# Allegro board PMOD2BNCSIMPLE_v1_06_62mil_cheap.brd
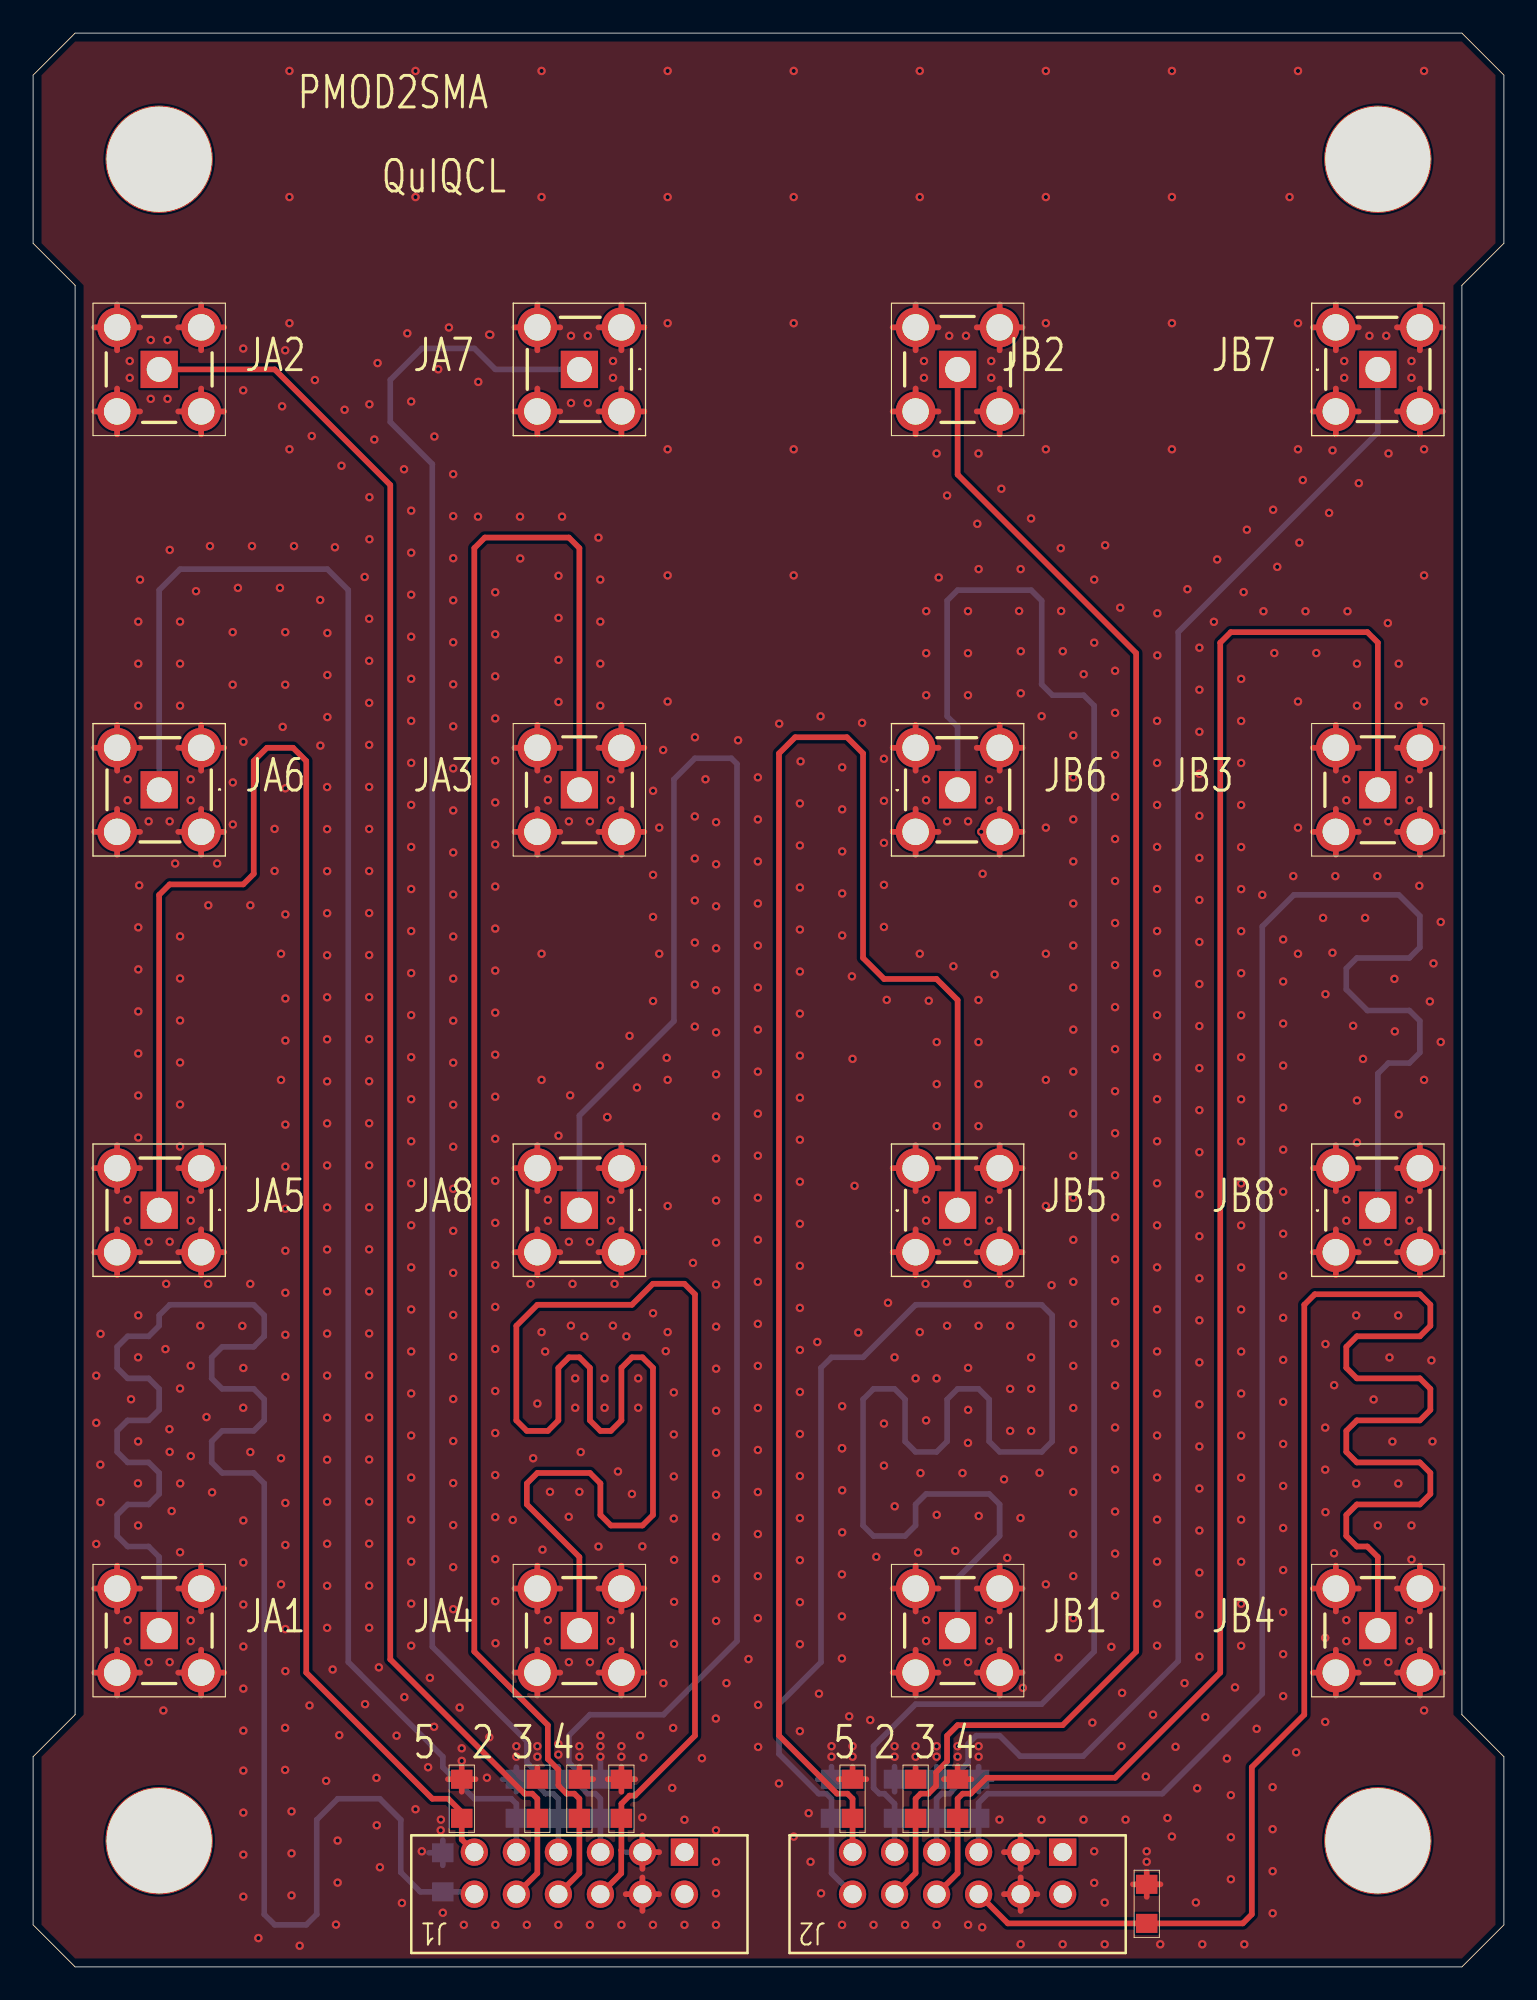
[diagram p0: board, top side]
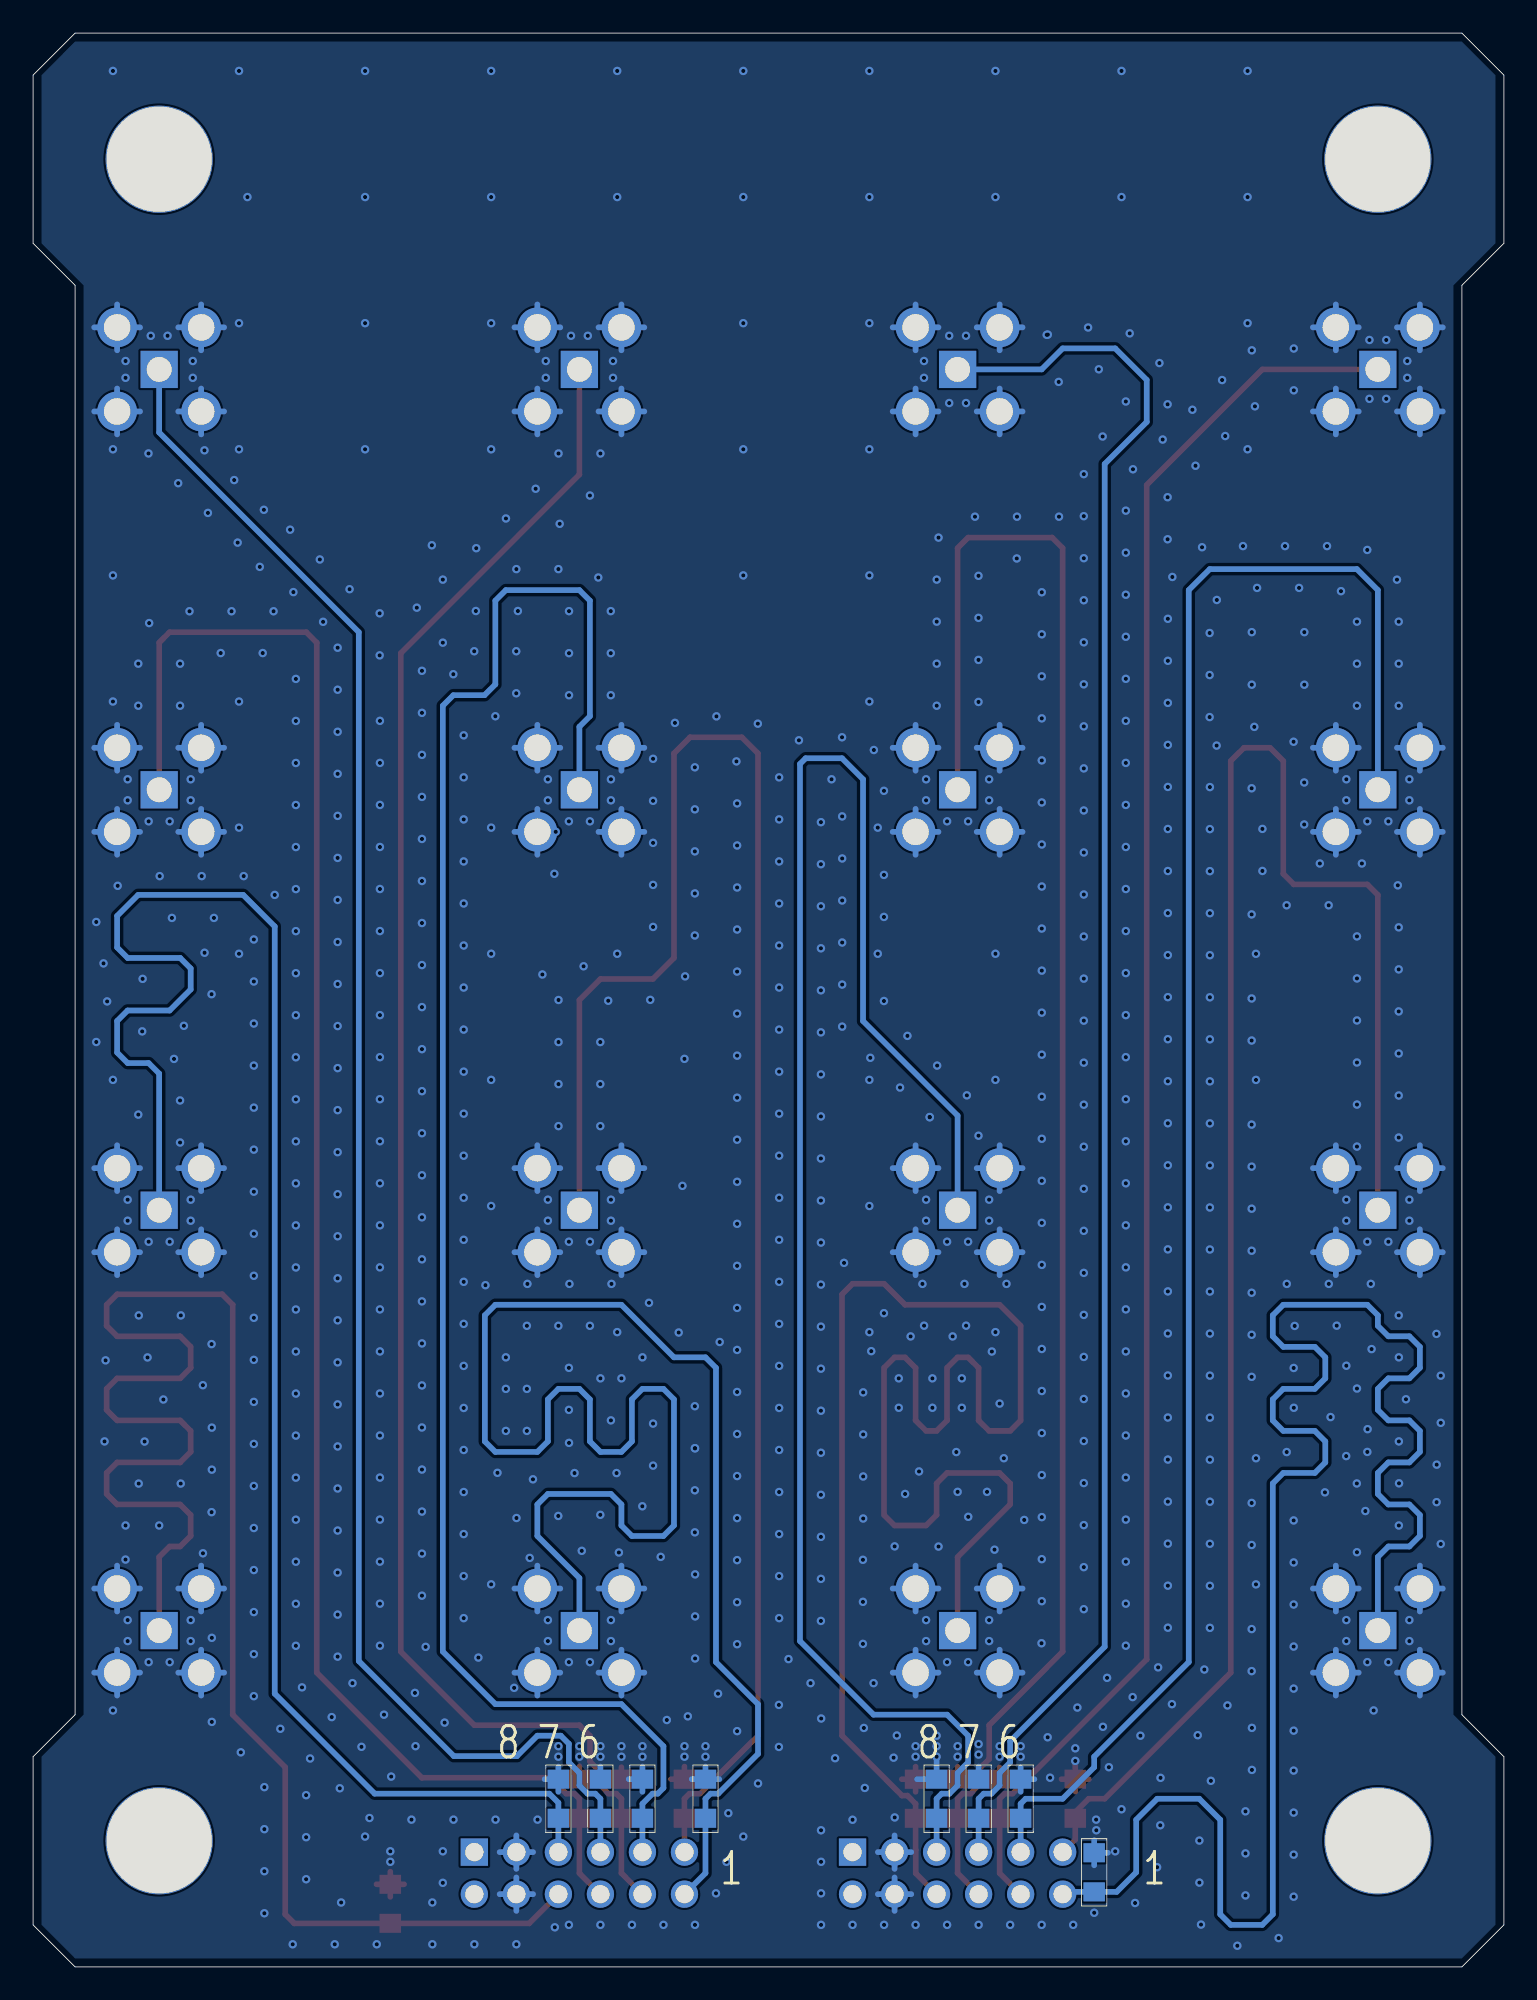
[diagram p1: board, bottom side, seen from below]

Outline 88.9 x 116.84 mm; copper layers: TOP, GND1, GND2, BOTTOM. Coordinates in mm from the lower left corner of the outline.
Outline path: 0,114.3 0,104.14 2.54,101.6 2.54,15.24 0,12.7 0,2.54 2.54,0 86.36,0 88.9,2.54 88.9,12.7 86.36,15.24 86.36,101.6 88.9,104.14 88.9,114.3 86.36,116.84 2.54,116.84 0,114.3

## Design rules (mm)
nets with their own width: min track width 0.34; nets GND N17882 N17894 N17906 N17918 N17930 N17948 N17973 N17998 N19655 N19661 N19667 N19673 N19679 N19687 N19697 N19707

## Placement (name value [footprint] x y rotation side)
J1  71764_0114  [717640112]  22.86 0.84 180 top
J2  71764_0114  [717640112]  45.72 0.84 180 top
NOREF  -  [unnamed]  81.28 7.62 0 top
NOREF#2  -  [unnamed]  81.28 109.22 0 top
NOREF#3  -  [unnamed]  7.62 7.62 0 top
NOREF#4  -  [unnamed]  7.62 109.22 0 top
R1  -  [RES_0805]  34.29 10.16 90 bottom
R2  -  [RES_0805]  31.75 10.16 90 bottom
R3  -  [RES_0805]  29.21 10.16 90 bottom
R4  -  [RES_0805]  25.91 10.16 90 top
R5  -  [RES_0805]  24.77 5.71 90 bottom
R6  -  [RES_0805]  30.48 10.16 90 top
R7  -  [RES_0805]  33.02 10.16 90 top
R8  -  [RES_0805]  35.56 10.16 90 top
R9  -  [RES_0805]  57.15 10.16 90 bottom
R10  -  [RES_0805]  54.61 10.16 90 bottom
R11  -  [RES_0805]  52.07 10.16 90 bottom
R12  -  [RES_0805]  49.53 10.16 90 top
R13  -  [RES_0805]  48.26 10.16 90 bottom
R14  -  [RES_0805]  53.34 10.16 90 top
R15  -  [RES_0805]  55.88 10.16 90 top
R16  -  [RES_0805]  67.31 3.81 90 top
U1  -  [SMA-R-RA]  7.62 45.72 180 top
U2  -  [SMAFST_PCBN]  7.62 20.32 180 top
U3  -  [SMA-R-RA]  7.62 71.12 180 top
U4  -  [SMAFST_PCBN]  7.62 96.52 180 top
U5  -  [SMA-R-RA]  33.02 96.52 180 top
U6  -  [SMAFST_PCBN]  33.02 71.12 180 top
U7  -  [SMA-R-RA]  33.02 45.72 180 top
U8  -  [SMAFST_PCBN]  33.02 20.32 180 top
U9  -  [SMA-R-RA]  55.88 45.72 0 top
U10  -  [SMAFST_PCBN]  55.88 20.32 180 top
U11  -  [SMA-R-RA]  55.88 71.12 0 top
U12  -  [SMAFST_PCBN]  55.88 96.52 180 top
U13  -  [SMA-R-RA]  81.28 96.52 0 top
U14  -  [SMAFST_PCBN]  81.28 71.12 180 top
U15  -  [SMA-R-RA]  81.28 45.72 0 top
U16  -  [SMAFST_PCBN]  81.28 20.32 180 top

## Library data of the parts
J1 J2 = 71764_0114
R1-R3 R5-R16 = RES_0805
R4 = RES_0805: signal model: resistorPack_850
U1 U3 U5 U7 U9 U11 U13 U15 = SMA-R-RA
U2 U4 U6 U8 U10 U12 U14 U16 = SMAFST_PCBN

## Footprints (pads in the part's own frame, mm; a bottom-side part is the same pattern mirrored in y, then rotated)
717640112
  rect 1.651x1.651 hole 1.1: 1(-16.51,-6.096)
  round 1.651 hole 1.1: 2(-16.51,-3.556) 3(-13.97,-6.096) 4(-13.97,-3.556) 5(-11.43,-6.096) 6(-11.43,-3.556) 7(-8.89,-6.096) 8(-8.89,-3.556) 9(-6.35,-6.096) 10(-6.35,-3.556) 11(-3.81,-6.096) 12(-3.81,-3.556)
RES_0805
  rect 1.151x1.3 smd: 1(1.181,0) 2(-1.181,0)
SMA-R-RA
  rect 2.25x2.25 hole 1.501: 1(0,0)
  round 2.4 hole 1.6: 2(-2.54,2.54) 3(-2.54,-2.54) 4(2.54,-2.54) 5(2.54,2.54)
SMAFST_PCBN
  rect 2.25x2.25 hole 1.501: 1(0,0)
  round 2.4 hole 1.6: 2(-2.54,-2.54) 3(2.54,-2.54) 4(2.54,2.54) 5(-2.54,2.54)
unnamed
  round 6.477 hole 6.35 unplated: (0,0)

## Nets
GND: J1.3 J1.4 J2.3 J2.4 R1.1 R2.1 R3.1 R4.1 R5.1 R6.1 R7.1 R8.1 R9.1 R10.1 R11.1 R12.1 R13.1 R14.1 R15.1 R16.1 U1.2 U1.3 U1.4 U1.5 U2.2 U2.3 U2.4 U2.5 U3.2 U3.3 U3.4 U3.5 U4.2 U4.3 U4.4 U4.5 U5.2 U5.3 U5.4 U5.5 U6.2 U6.3 U6.4 U6.5 U7.2 U7.3 U7.4 U7.5 U8.2 U8.3 U8.4 U8.5 U9.2 U9.3 U9.4 U9.5 U10.2 U10.3 U10.4 U10.5 U11.2 U11.3 U11.4 U11.5 U12.2 U12.3 U12.4 U12.5 U13.2 U13.3 U13.4 U13.5 U14.2 U14.3 U14.4 U14.5 U15.2 U15.3 U15.4 U15.5 U16.2 U16.3 U16.4 U16.5
N17882: J1.11 R4.2 U1.1
N17894: J1.9 R3.2 U3.1
N17906: J1.7 R2.2 U5.1
N17918: J1.5 R1.2 U7.1
N17930: J1.12 R5.2 U2.1
N17948: J1.10 R6.2 U4.1
N17973: J1.8 R7.2 U6.1
N17998: J1.6 R8.2 U8.1
N19655: J2.11 R12.2 U9.1
N19661: J2.9 R11.2 U11.1
N19667: J2.7 R10.2 U13.1
N19673: J2.5 R9.2 U15.1
N19679: J2.12 R13.2 U10.1
N19687: J2.10 R14.2 U12.1
N19697: J2.8 R15.2 U14.1
N19707: J2.6 R16.2 U16.1

Pads without a net: J1 1 2; J2 1 2

## Via types
v1: diameter 0.508, hole 0.254, TOP to BOTTOM, 990 vias

## Routing (per net, layer and track width the routed paths; a pad name or vN(x,y) marks a point on that pad's centre or on a via; arc(x,y) is an arc through that point)
GND: length 1509.2
  TOP w0.34: 82.44,17.78 U16.5 ; U16.5 83.82,19.16 ; U16.5 83.82,16.4 ; U16.5 85.2,17.78 ; U5.2 36.94,93.98 ; U5.2 35.56,95.36 ; U5.2 35.56,92.6 ; U5.2 34.18,93.98 ; U6.4 30.48,69.96 ; U6.4 31.86,68.58 ; U6.4 30.48,67.2 ; U6.4 29.1,68.58 ; 34.73,11.34 R8.1 ; R8.1 36.39,11.34 ; R8.1 35.56,12.1 ; R8.1 35.56,10.58 ; U15.2 78.74,49.64 ; U15.2 78.74,46.88 ; U15.2 77.36,48.26 ; U15.2 80.12,48.26 ; U8.4 31.86,17.78 ; U8.4 30.48,16.4 ; U8.4 29.1,17.78 ; U8.4 30.48,19.16 ; U2.2 11.54,22.86 ; U2.2 10.16,24.24 ; U2.2 8.78,22.86 ; U2.2 10.16,21.48 ; U8.2 35.56,24.24 ; U8.2 36.94,22.86 ; U8.2 35.56,21.48 ; U8.2 34.18,22.86 ; 58.42,16.4 U10.5 ; U10.5 59.8,17.78 ; U10.5 58.42,19.16 ; U10.5 57.04,17.78 ; 51.96,99.06 U12.3 ; U12.3 53.34,97.68 ; U12.3 54.72,99.06 ; U12.3 53.34,100.44 ; 35.56,41.8 U7.2 ; U7.2 36.94,43.18 ; U7.2 35.56,44.56 ; U7.2 34.18,43.18 ; 34.18,48.26 U7.3 ; U7.3 35.56,49.64 ; U7.3 35.56,46.88 ; U7.3 36.94,48.26 ; 58.42,97.68 U12.2 ; U12.2 57.04,99.06 ; U12.2 58.42,100.44 ; U12.2 59.8,99.06 ; U9.2 54.72,48.26 ; U9.2 53.34,49.64 ; U9.2 51.96,48.26 ; U9.2 53.34,46.88 ; U2.4 5.08,19.16 ; U2.4 6.46,17.78 ; U2.4 5.08,16.4 ; U2.4 3.7,17.78 ; 82.44,99.06 U13.5 ; U13.5 83.82,100.44 ; U13.5 83.82,97.68 ; U13.5 85.2,99.06 ; U12.5 59.8,93.98 ; U12.5 58.42,92.6 ; U12.5 57.04,93.98 ; U12.5 58.42,95.36 ; 10.16,92.6 U4.5 ; U4.5 11.54,93.98 ; U4.5 10.16,95.36 ; U4.5 8.78,93.98 ; 58.42,41.8 U9.4 ; U9.4 58.42,44.56 ; U9.4 57.04,43.18 ; U9.4 59.8,43.18 ; 53.34,21.48 U10.3 ; U10.3 54.72,22.86 ; U10.3 51.96,22.86 ; U10.3 53.34,24.24 ; U7.4 30.48,49.64 ; U7.4 30.48,46.88 ; U7.4 29.1,48.26 ; U7.4 31.86,48.26 ; U12.4 54.72,93.98 ; U12.4 51.96,93.98 ; U12.4 53.34,95.36 ; U12.4 53.34,92.6 ; U16.4 78.74,19.16 ; U16.4 78.74,16.4 ; U16.4 80.12,17.78 ; U16.4 77.36,17.78 ; U16.2 85.2,22.86 ; U16.2 82.44,22.86 ; U16.2 83.82,21.48 ; U16.2 83.82,24.24 ; U1.4 6.46,48.26 ; U1.4 5.08,49.64 ; U1.4 3.7,48.26 ; U1.4 5.08,46.88 ; 5.08,92.6 U4.4 ; U4.4 6.46,93.98 ; U4.4 3.7,93.98 ; U4.4 5.08,95.36 ; U15.4 85.2,43.18 ; U15.4 83.82,41.8 ; U15.4 82.44,43.18 ; U15.4 83.82,44.56 ; 77.36,43.18 U15.3 ; U15.3 78.74,41.8 ; U15.3 80.12,43.18 ; U15.3 78.74,44.56 ; J1.4 36.83,5.4 ; J1.4 35.82,4.39 ; J1.4 36.83,3.39 ; J1.4 37.84,4.39 ; 58.68,6.93 J2.3 ; J2.3 59.69,5.93 ; J2.3 59.69,7.94 ; J2.3 60.7,6.93 ; 25.07,11.34 R4.1 ; R4.1 26.74,11.34 ; R4.1 25.91,10.58 ; R4.1 v1(25.91,12.45) ; 35.56,16.4 U8.5 ; U8.5 36.94,17.78 ; U8.5 35.56,19.16 ; U8.5 34.18,17.78 ; 78.74,67.2 U14.4 ; U14.4 80.12,68.58 ; U14.4 77.36,68.58 ; U14.4 78.74,69.96 ; U4.3 6.46,99.06 ; U4.3 3.7,99.06 ; U4.3 5.08,97.68 ; U4.3 5.08,100.44 ; 66.48,4.99 R16.1 ; R16.1 67.31,5.75 ; R16.1 68.14,4.99 ; R16.1 67.31,4.23 ; U2.5 10.16,19.16 ; U2.5 10.16,16.4 ; U2.5 11.54,17.78 ; U2.5 8.78,17.78 ; U5.4 31.86,99.06 ; U5.4 30.48,100.44 ; U5.4 30.48,97.68 ; U5.4 29.1,99.06 ; U6.3 31.86,73.66 ; U6.3 30.48,72.28 ; U6.3 30.48,75.04 ; U6.3 29.1,73.66 ; 10.16,46.88 U1.3 ; U1.3 10.16,49.64 ; U1.3 11.54,48.26 ; U1.3 8.78,48.26 ; R12.1 50.36,11.34 ; R12.1 49.53,12.1 ; R12.1 48.7,11.34 ; U14.5 85.2,68.58 ; U14.5 83.82,69.96 ; U14.5 82.44,68.58 ; U14.5 83.82,67.2 ; U7.5 31.86,43.18 ; U7.5 30.48,41.8 ; U7.5 30.48,44.56 ; U7.5 29.1,43.18 ; 36.83,5.93 J1.3 ; J1.3 37.84,6.93 ; J1.3 36.83,7.94 ; U9.3 53.34,44.56 ; U9.3 54.72,43.18 ; U9.3 53.34,41.8 ; U9.3 51.96,43.18 ; 5.08,67.2 U3.5 ; U3.5 5.08,69.96 ; U3.5 6.46,68.58 ; U3.5 3.7,68.58 ; 58.42,72.28 U11.5 ; U11.5 57.04,73.66 ; U11.5 59.8,73.66 ; U11.5 58.42,75.04 ; 10.16,97.68 U4.2 ; U4.2 8.78,99.06 ; U4.2 11.54,99.06 ; U4.2 10.16,100.44 ; U5.5 31.86,93.98 ; U5.5 30.48,95.36 ; U5.5 29.1,93.98 ; U5.5 30.48,92.6 ; 35.56,67.2 U6.5 ; U6.5 36.94,68.58 ; U6.5 35.56,69.96 ; U6.5 34.18,68.58 ; U10.2 58.42,24.24 ; U10.2 58.42,21.48 ; U10.2 57.04,22.86 ; U10.2 59.8,22.86 ; 53.34,67.2 U11.3 ; U11.3 54.72,68.58 ; U11.3 51.96,68.58 ; U11.3 53.34,69.96 ; 83.82,46.88 U15.5 ; U15.5 82.44,48.26 ; U15.5 85.2,48.26 ; U15.5 83.82,49.64 ; U1.2 10.16,44.56 ; U1.2 10.16,41.8 ; U1.2 11.54,43.18 ; U1.2 8.78,43.18 ; 5.08,41.8 U1.5 ; U1.5 6.46,43.18 ; U1.5 5.08,44.56 ; U1.5 3.7,43.18 ; U3.4 6.46,73.66 ; U3.4 5.08,75.04 ; U3.4 5.08,72.28 ; U3.4 3.7,73.66 ; 53.34,16.4 U10.4 ; U10.4 54.72,17.78 ; U10.4 51.96,17.78 ; U10.4 53.34,19.16 ; R15.1 56.71,11.34 ; R15.1 55.05,11.34 ; R15.1 55.88,12.13 ; U14.2 83.82,75.04 ; U14.2 82.44,73.66 ; U14.2 85.2,73.66 ; U14.2 83.82,72.28 ; U5.3 36.94,99.06 ; U5.3 34.18,99.06 ; U5.3 35.56,97.68 ; U5.3 35.56,100.44 ; 33.02,12.1 R7.1 33.85,11.34 ; U8.3 30.48,24.24 ; U8.3 29.1,22.86 ; U8.3 31.86,22.86 ; U8.3 30.48,21.48 ; U13.2 80.12,99.06 ; U13.2 78.74,100.44 ; U13.2 77.36,99.06 ; U13.2 78.74,97.68 ; U14.3 80.12,73.66 ; U14.3 78.74,75.04 ; U14.3 77.36,73.66 ; U14.3 78.74,72.28 ; 53.34,72.28 U11.2 ; U11.2 54.72,73.66 ; U11.2 51.96,73.66 ; U11.2 53.34,75.04 ; 8.78,68.58 U3.2 ; U3.2 10.16,69.96 ; U3.2 10.16,67.2 ; U3.2 11.54,68.58 ; U16.3 80.12,22.86 ; U16.3 78.74,24.24 ; U16.3 77.36,22.86 ; U16.3 78.74,21.48 ; U13.3 78.74,95.36 ; U13.3 80.12,93.98 ; U13.3 78.74,92.6 ; U13.3 77.36,93.98 ; 58.42,46.88 U9.5 ; U9.5 58.42,49.64 ; U9.5 59.8,48.26 ; U9.5 57.04,48.26 ; U2.3 5.08,24.24 ; U2.3 6.46,22.86 ; U2.3 5.08,21.48 ; U2.3 3.7,22.86 ; J2.4 59.69,5.4 ; J2.4 60.7,4.39 ; J2.4 58.68,4.39 ; J2.4 59.69,3.39 ; R6.1 30.48,12.06 ; 35.56,72.28 U6.2 ; U6.2 34.18,73.66 ; U6.2 35.56,75.04 ; U6.2 36.94,73.66 ; 82.44,93.98 U13.4 ; U13.4 83.82,95.36 ; U13.4 85.2,93.98 ; U13.4 83.82,92.6 ; U3.3 11.54,73.66 ; U3.3 8.78,73.66 ; U3.3 10.16,75.04 ; U3.3 10.16,72.28 ; U11.4 59.8,68.58 ; U11.4 58.42,67.2 ; U11.4 58.42,69.96 ; R14.1 53.34,12.06
  GND1 w0.34: U5.3 36.94,99.06 ; U5.3 34.18,99.06 ; U5.3 35.56,100.44 ; U5.3 35.56,97.68 ; 30.48,97.68 U5.4 ; U5.4 31.86,99.06 ; U5.4 29.1,99.06 ; U5.4 30.48,100.44 ; 58.68,6.93 J2.3 ; J2.3 59.69,7.94 ; J2.3 60.7,6.93 ; J2.3 59.69,5.93 ; U2.5 10.16,19.16 ; U2.5 8.78,17.78 ; U2.5 10.16,16.4 ; U2.5 11.54,17.78 ; 35.56,41.8 U7.2 ; U7.2 34.18,43.18 ; U7.2 36.94,43.18 ; U7.2 35.56,44.56 ; 83.82,72.28 U14.2 ; U14.2 82.44,73.66 ; U14.2 83.82,75.04 ; U14.2 85.2,73.66 ; U10.2 59.8,22.86 ; U10.2 58.42,24.24 ; U10.2 58.42,21.48 ; U10.2 57.04,22.86 ; U16.4 78.74,19.16 ; U16.4 80.12,17.78 ; U16.4 78.74,16.4 ; U16.4 77.36,17.78 ; 34.18,22.86 U8.2 ; U8.2 35.56,21.48 ; U8.2 36.94,22.86 ; U8.2 35.56,24.24 ; U2.4 5.08,19.16 ; U2.4 3.7,17.78 ; U2.4 5.08,16.4 ; U2.4 6.46,17.78 ; U15.4 83.82,44.56 ; U15.4 82.44,43.18 ; U15.4 83.82,41.8 ; U15.4 85.2,43.18 ; 8.78,43.18 U1.2 ; U1.2 11.54,43.18 ; U1.2 10.16,41.8 ; U1.2 10.16,44.56 ; 78.74,72.28 U14.3 ; U14.3 80.12,73.66 ; U14.3 77.36,73.66 ; U14.3 78.74,75.04 ; U10.3 54.72,22.86 ; U10.3 51.96,22.86 ; U10.3 53.34,24.24 ; U10.3 53.34,21.48 ; J1.3 37.84,6.93 ; J1.3 36.83,5.93 ; J1.3 35.82,6.93 ; J1.3 36.83,7.94 ; 57.04,93.98 U12.5 ; U12.5 58.42,95.36 ; U12.5 58.42,92.6 ; U12.5 59.8,93.98 ; 78.74,46.88 U15.2 ; U15.2 80.12,48.26 ; U15.2 77.36,48.26 ; U15.2 78.74,49.64 ; U11.2 53.34,75.04 ; U11.2 53.34,72.28 ; U11.2 51.96,73.66 ; U11.2 54.72,73.66 ; U6.3 30.48,75.04 ; U6.3 30.48,72.28 ; U6.3 29.1,73.66 ; U6.3 31.86,73.66 ; U15.3 80.12,43.18 ; U15.3 78.74,44.56 ; U15.3 77.36,43.18 ; U15.3 78.74,41.8 ; U6.5 36.94,68.58 ; U6.5 35.56,69.96 ; U6.5 34.18,68.58 ; U6.5 35.56,67.2 ; U3.5 5.08,69.96 ; U3.5 6.46,68.58 ; U3.5 5.08,67.2 ; U3.5 3.7,68.58 ; U7.5 31.86,43.18 ; U7.5 29.1,43.18 ; U7.5 30.48,44.56 ; U7.5 30.48,41.8 ; U8.4 30.48,19.16 ; U8.4 30.48,16.4 ; U8.4 31.86,17.78 ; U8.4 29.1,17.78 ; U7.3 36.94,48.26 ; U7.3 35.56,49.64 ; U7.3 35.56,46.88 ; U7.3 34.18,48.26 ; 78.74,67.2 U14.4 ; U14.4 80.12,68.58 ; U14.4 77.36,68.58 ; U14.4 78.74,69.96 ; U3.4 6.46,73.66 ; U3.4 3.7,73.66 ; U3.4 5.08,72.28 ; U3.4 5.08,75.04 ; 58.42,16.4 U10.5 ; U10.5 58.42,19.16 ; U10.5 57.04,17.78 ; U10.5 59.8,17.78 ; 83.82,97.68 U13.5 ; U13.5 83.82,100.44 ; U13.5 82.44,99.06 ; U13.5 85.2,99.06 ; U9.3 53.34,44.56 ; U9.3 53.34,41.8 ; U9.3 54.72,43.18 ; U9.3 51.96,43.18 ; 58.42,97.68 U12.2 ; U12.2 58.42,100.44 ; U12.2 59.8,99.06 ; U12.2 57.04,99.06 ; U12.3 53.34,100.44 ; U12.3 53.34,97.68 ; U12.3 51.96,99.06 ; U12.3 54.72,99.06 ; U9.4 59.8,43.18 ; U9.4 57.04,43.18 ; U9.4 58.42,44.56 ; U9.4 58.42,41.8 ; U10.4 53.34,19.16 ; U10.4 54.72,17.78 ; U10.4 53.34,16.4 ; U10.4 51.96,17.78 ; U1.3 10.16,49.64 ; U1.3 10.16,46.88 ; U1.3 11.54,48.26 ; U1.3 8.78,48.26 ; U4.3 5.08,100.44 ; U4.3 6.46,99.06 ; U4.3 5.08,97.68 ; U4.3 3.7,99.06 ; 5.08,46.88 U1.4 ; U1.4 3.7,48.26 ; U1.4 6.46,48.26 ; U1.4 5.08,49.64 ; U1.5 6.46,43.18 ; U1.5 5.08,41.8 ; U1.5 3.7,43.18 ; U1.5 5.08,44.56 ; 83.82,46.88 U15.5 ; U15.5 83.82,49.64 ; U15.5 85.2,48.26 ; U15.5 82.44,48.26 ; 58.42,72.28 U11.5 ; U11.5 57.04,73.66 ; U11.5 59.8,73.66 ; U11.5 58.42,75.04 ; 82.44,68.58 U14.5 ; U14.5 85.2,68.58 ; U14.5 83.82,67.2 ; U14.5 83.82,69.96 ; U9.5 59.8,48.26 ; U9.5 58.42,49.64 ; U9.5 58.42,46.88 ; U9.5 57.04,48.26 ; J1.4 36.83,5.4 ; J1.4 36.83,3.39 ; J1.4 35.82,4.39 ; J1.4 37.84,4.39 ; J2.4 59.69,5.4 ; J2.4 59.69,3.39 ; J2.4 60.7,4.39 ; J2.4 58.68,4.39 ; U13.2 78.74,100.44 ; U13.2 80.12,99.06 ; U13.2 77.36,99.06 ; U13.2 78.74,97.68 ; U5.5 30.48,95.36 ; U5.5 30.48,92.6 ; U5.5 31.86,93.98 ; U5.5 29.1,93.98 ; U6.4 31.86,68.58 ; U6.4 29.1,68.58 ; U6.4 30.48,69.96 ; U6.4 30.48,67.2 ; U8.3 30.48,24.24 ; U8.3 30.48,21.48 ; U8.3 31.86,22.86 ; U8.3 29.1,22.86 ; 82.44,17.78 U16.5 ; U16.5 85.2,17.78 ; U16.5 83.82,19.16 ; U16.5 83.82,16.4 ; 8.78,22.86 U2.2 ; U2.2 10.16,24.24 ; U2.2 11.54,22.86 ; U2.2 10.16,21.48 ; U11.3 53.34,69.96 ; U11.3 51.96,68.58 ; U11.3 54.72,68.58 ; U11.3 53.34,67.2 ; U13.4 83.82,95.36 ; U13.4 82.44,93.98 ; U13.4 85.2,93.98 ; U13.4 83.82,92.6 ; 51.96,48.26 U9.2 ; U9.2 53.34,49.64 ; U9.2 54.72,48.26 ; U9.2 53.34,46.88 ; 10.16,72.28 U3.3 ; U3.3 10.16,75.04 ; U3.3 8.78,73.66 ; U3.3 11.54,73.66 ; 34.18,73.66 U6.2 ; U6.2 36.94,73.66 ; U6.2 35.56,75.04 ; U6.2 35.56,72.28 ; U3.2 10.16,69.96 ; U3.2 10.16,67.2 ; U3.2 11.54,68.58 ; U3.2 8.78,68.58 ; U4.5 11.54,93.98 ; U4.5 8.78,93.98 ; U4.5 10.16,92.6 ; U4.5 10.16,95.36 ; U5.2 36.94,93.98 ; U5.2 35.56,95.36 ; U5.2 35.56,92.6 ; U5.2 34.18,93.98 ; U13.3 80.12,93.98 ; U13.3 78.74,95.36 ; U13.3 78.74,92.6 ; U13.3 77.36,93.98 ; U16.2 83.82,24.24 ; U16.2 82.44,22.86 ; U16.2 83.82,21.48 ; U16.2 85.2,22.86 ; U8.5 35.56,19.16 ; U8.5 35.56,16.4 ; U8.5 36.94,17.78 ; U8.5 34.18,17.78 ; 5.08,21.48 U2.3 ; U2.3 3.7,22.86 ; U2.3 6.46,22.86 ; U2.3 5.08,24.24 ; U7.4 31.86,48.26 ; U7.4 30.48,49.64 ; U7.4 30.48,46.88 ; U7.4 29.1,48.26 ; 77.36,22.86 U16.3 ; U16.3 80.12,22.86 ; U16.3 78.74,24.24 ; U16.3 78.74,21.48 ; U4.2 10.16,100.44 ; U4.2 11.54,99.06 ; U4.2 8.78,99.06 ; U4.2 10.16,97.68 ; 5.08,92.6 U4.4 ; U4.4 3.7,93.98 ; U4.4 5.08,95.36 ; U4.4 6.46,93.98 ; U12.4 54.72,93.98 ; U12.4 53.34,95.36 ; U12.4 51.96,93.98 ; U12.4 53.34,92.6 ; U11.4 58.42,69.96 ; U11.4 59.8,68.58 ; U11.4 58.42,67.2
  GND2 w0.34: 35.56,16.4 U8.5 ; U8.5 34.18,17.78 ; U8.5 35.56,19.16 ; U8.5 36.94,17.78 ; U8.3 31.86,22.86 ; U8.3 29.1,22.86 ; U8.3 30.48,24.24 ; U8.3 30.48,21.48 ; 35.56,72.28 U6.2 ; U6.2 34.18,73.66 ; U6.2 35.56,75.04 ; U6.2 36.94,73.66 ; U16.4 80.12,17.78 ; U16.4 77.36,17.78 ; U16.4 78.74,16.4 ; U16.4 78.74,19.16 ; 34.18,68.58 U6.5 ; U6.5 35.56,67.2 ; U6.5 35.56,69.96 ; U6.5 36.94,68.58 ; U9.4 59.8,43.18 ; U9.4 57.04,43.18 ; U9.4 58.42,44.56 ; U9.4 58.42,41.8 ; 30.48,92.6 U5.5 ; U5.5 30.48,95.36 ; U5.5 31.86,93.98 ; U5.5 29.1,93.98 ; U2.2 11.54,22.86 ; U2.2 10.16,21.48 ; U2.2 10.16,24.24 ; U2.2 8.78,22.86 ; 77.36,22.86 U16.3 ; U16.3 78.74,21.48 ; U16.3 80.12,22.86 ; U16.3 78.74,24.24 ; U13.2 80.12,99.06 ; U13.2 78.74,97.68 ; U13.2 77.36,99.06 ; U13.2 78.74,100.44 ; U9.3 53.34,44.56 ; U9.3 51.96,43.18 ; U9.3 54.72,43.18 ; U9.3 53.34,41.8 ; 5.08,16.4 U2.4 ; U2.4 3.7,17.78 ; U2.4 5.08,19.16 ; U2.4 6.46,17.78 ; U13.4 83.82,95.36 ; U13.4 83.82,92.6 ; U13.4 85.2,93.98 ; U13.4 82.44,93.98 ; U14.5 83.82,69.96 ; U14.5 82.44,68.58 ; U14.5 85.2,68.58 ; U14.5 83.82,67.2 ; U4.2 10.16,100.44 ; U4.2 8.78,99.06 ; U4.2 11.54,99.06 ; U4.2 10.16,97.68 ; U15.5 83.82,49.64 ; U15.5 83.82,46.88 ; U15.5 82.44,48.26 ; U15.5 85.2,48.26 ; U7.4 30.48,49.64 ; U7.4 29.1,48.26 ; U7.4 30.48,46.88 ; U7.4 31.86,48.26 ; 78.74,67.2 U14.4 ; U14.4 77.36,68.58 ; U14.4 80.12,68.58 ; U14.4 78.74,69.96 ; J1.3 36.83,7.94 ; J1.3 37.84,6.93 ; J1.3 36.83,5.93 ; J1.3 35.82,6.93 ; 10.16,72.28 U3.3 ; U3.3 10.16,75.04 ; U3.3 8.78,73.66 ; U3.3 11.54,73.66 ; 58.42,46.88 U9.5 ; U9.5 59.8,48.26 ; U9.5 58.42,49.64 ; U9.5 57.04,48.26 ; 5.08,46.88 U1.4 ; U1.4 6.46,48.26 ; U1.4 3.7,48.26 ; U1.4 5.08,49.64 ; 53.34,92.6 U12.4 ; U12.4 51.96,93.98 ; U12.4 53.34,95.36 ; U12.4 54.72,93.98 ; 3.7,68.58 U3.5 ; U3.5 5.08,67.2 ; U3.5 6.46,68.58 ; U3.5 5.08,69.96 ; 57.04,73.66 U11.5 ; U11.5 58.42,75.04 ; U11.5 59.8,73.66 ; U11.5 58.42,72.28 ; 58.42,16.4 U10.5 ; U10.5 57.04,17.78 ; U10.5 59.8,17.78 ; U10.5 58.42,19.16 ; U5.4 31.86,99.06 ; U5.4 29.1,99.06 ; U5.4 30.48,100.44 ; U5.4 30.48,97.68 ; 82.44,43.18 U15.4 ; U15.4 85.2,43.18 ; U15.4 83.82,41.8 ; U15.4 83.82,44.56 ; 57.04,99.06 U12.2 ; U12.2 58.42,100.44 ; U12.2 58.42,97.68 ; U12.2 59.8,99.06 ; 51.96,68.58 U11.3 ; U11.3 53.34,67.2 ; U11.3 54.72,68.58 ; U11.3 53.34,69.96 ; U2.5 11.54,17.78 ; U2.5 8.78,17.78 ; U2.5 10.16,16.4 ; U2.5 10.16,19.16 ; U12.3 54.72,99.06 ; U12.3 53.34,97.68 ; U12.3 53.34,100.44 ; U12.3 51.96,99.06 ; 77.36,48.26 U15.2 ; U15.2 78.74,49.64 ; U15.2 78.74,46.88 ; U15.2 80.12,48.26 ; 35.56,46.88 U7.3 ; U7.3 34.18,48.26 ; U7.3 35.56,49.64 ; U7.3 36.94,48.26 ; 10.16,46.88 U1.3 ; U1.3 8.78,48.26 ; U1.3 10.16,49.64 ; U1.3 11.54,48.26 ; U11.4 58.42,69.96 ; U11.4 58.42,67.2 ; U11.4 59.8,68.58 ; U7.2 36.94,43.18 ; U7.2 34.18,43.18 ; U7.2 35.56,41.8 ; U7.2 35.56,44.56 ; 78.74,41.8 U15.3 ; U15.3 78.74,44.56 ; U15.3 80.12,43.18 ; U15.3 77.36,43.18 ; 5.08,21.48 U2.3 ; U2.3 3.7,22.86 ; U2.3 5.08,24.24 ; U2.3 6.46,22.86 ; 34.18,22.86 U8.2 ; U8.2 35.56,24.24 ; U8.2 36.94,22.86 ; U8.2 35.56,21.48 ; U6.4 30.48,69.96 ; U6.4 29.1,68.58 ; U6.4 30.48,67.2 ; U6.4 31.86,68.58 ; 8.78,93.98 U4.5 ; U4.5 10.16,95.36 ; U4.5 10.16,92.6 ; U4.5 11.54,93.98 ; U14.3 80.12,73.66 ; U14.3 78.74,75.04 ; U14.3 78.74,72.28 ; U14.3 77.36,73.66 ; 5.08,92.6 U4.4 ; U4.4 6.46,93.98 ; U4.4 5.08,95.36 ; U4.4 3.7,93.98 ; 58.42,21.48 U10.2 ; U10.2 57.04,22.86 ; U10.2 59.8,22.86 ; U10.2 58.42,24.24 ; U8.4 30.48,19.16 ; U8.4 31.86,17.78 ; U8.4 29.1,17.78 ; U8.4 30.48,16.4 ; 5.08,41.8 U1.5 ; U1.5 5.08,44.56 ; U1.5 3.7,43.18 ; U1.5 6.46,43.18 ; U1.2 11.54,43.18 ; U1.2 10.16,44.56 ; U1.2 10.16,41.8 ; U1.2 8.78,43.18 ; J2.4 60.7,4.39 ; J2.4 59.69,3.39 ; J2.4 59.69,5.4 ; J2.4 58.68,4.39 ; 83.82,21.48 U16.2 ; U16.2 82.44,22.86 ; U16.2 83.82,24.24 ; U16.2 85.2,22.86 ; 29.1,43.18 U7.5 ; U7.5 30.48,41.8 ; U7.5 31.86,43.18 ; U7.5 30.48,44.56 ; J2.3 60.7,6.93 ; J2.3 59.69,5.93 ; J2.3 58.68,6.93 ; J2.3 59.69,7.94 ; 83.82,97.68 U13.5 ; U13.5 83.82,100.44 ; U13.5 82.44,99.06 ; U13.5 85.2,99.06 ; 53.34,21.48 U10.3 ; U10.3 51.96,22.86 ; U10.3 53.34,24.24 ; U10.3 54.72,22.86 ; U6.3 31.86,73.66 ; U6.3 30.48,72.28 ; U6.3 29.1,73.66 ; U6.3 30.48,75.04 ; U3.4 5.08,75.04 ; U3.4 6.46,73.66 ; U3.4 5.08,72.28 ; U3.4 3.7,73.66 ; U5.2 36.94,93.98 ; U5.2 34.18,93.98 ; U5.2 35.56,92.6 ; U5.2 35.56,95.36 ; 53.34,46.88 U9.2 ; U9.2 51.96,48.26 ; U9.2 54.72,48.26 ; U9.2 53.34,49.64 ; U13.3 78.74,95.36 ; U13.3 78.74,92.6 ; U13.3 77.36,93.98 ; U13.3 80.12,93.98 ; 8.78,68.58 U3.2 ; U3.2 10.16,69.96 ; U3.2 11.54,68.58 ; U3.2 10.16,67.2 ; U14.2 85.2,73.66 ; U14.2 83.82,75.04 ; U14.2 82.44,73.66 ; U14.2 83.82,72.28 ; 53.34,16.4 U10.4 ; U10.4 53.34,19.16 ; U10.4 51.96,17.78 ; U10.4 54.72,17.78 ; 57.04,93.98 U12.5 ; U12.5 58.42,92.6 ; U12.5 59.8,93.98 ; U12.5 58.42,95.36 ; 3.7,99.06 U4.3 ; U4.3 5.08,97.68 ; U4.3 6.46,99.06 ; U4.3 5.08,100.44 ; J1.4 37.84,4.39 ; J1.4 36.83,5.4 ; J1.4 36.83,3.39 ; J1.4 35.82,4.39 ; 53.34,72.28 U11.2 ; U11.2 53.34,75.04 ; U11.2 51.96,73.66 ; U11.2 54.72,73.66 ; U16.5 85.2,17.78 ; U16.5 82.44,17.78 ; U16.5 83.82,16.4 ; U16.5 83.82,19.16 ; U5.3 36.94,99.06 ; U5.3 34.18,99.06 ; U5.3 35.56,100.44 ; U5.3 35.56,97.68
  BOTTOM w0.34: 10.16,97.68 U4.2 ; U4.2 8.78,99.06 ; U4.2 10.16,100.44 ; U4.2 11.54,99.06 ; R9.1 57.15,12.1 ; R9.1 57.98,11.34 ; R9.1 57.15,10.58 ; U1.4 5.08,49.64 ; U1.4 5.08,46.88 ; U1.4 6.46,48.26 ; U1.4 3.7,48.26 ; U16.2 85.2,22.86 ; U16.2 82.44,22.86 ; U16.2 83.82,24.24 ; U16.2 83.82,21.48 ; U10.5 59.8,17.78 ; U10.5 58.42,16.4 ; U10.5 57.04,17.78 ; U10.5 58.42,19.16 ; 34.18,22.86 U8.2 ; U8.2 36.94,22.86 ; U8.2 35.56,24.24 ; U8.2 35.56,21.48 ; U6.4 30.48,69.96 ; U6.4 29.1,68.58 ; U6.4 30.48,67.2 ; U6.4 31.86,68.58 ; R11.1 52.07,12.1 ; R11.1 52.07,10.58 ; R11.1 52.9,11.34 ; 51.96,99.06 U12.3 ; U12.3 54.72,99.06 ; U12.3 53.34,97.68 ; U12.3 53.34,100.44 ; U11.3 54.72,68.58 ; U11.3 53.34,67.2 ; U11.3 51.96,68.58 ; U11.3 53.34,69.96 ; U13.2 80.12,99.06 ; U13.2 78.74,100.44 ; U13.2 78.74,97.68 ; U13.2 77.36,99.06 ; 34.18,68.58 U6.5 ; U6.5 35.56,67.2 ; U6.5 35.56,69.96 ; U6.5 36.94,68.58 ; 51.96,48.26 U9.2 ; U9.2 54.72,48.26 ; U9.2 53.34,46.88 ; U9.2 53.34,49.64 ; 57.04,99.06 U12.2 ; U12.2 58.42,97.68 ; U12.2 58.42,100.44 ; U12.2 59.8,99.06 ; U13.4 83.82,95.36 ; U13.4 83.82,92.6 ; U13.4 82.44,93.98 ; U13.4 85.2,93.98 ; U5.4 31.86,99.06 ; U5.4 29.1,99.06 ; U5.4 30.48,100.44 ; U5.4 30.48,97.68 ; U8.3 31.86,22.86 ; U8.3 30.48,21.48 ; U8.3 30.48,24.24 ; U8.3 29.1,22.86 ; 53.34,16.4 U10.4 ; U10.4 53.34,19.16 ; U10.4 54.72,17.78 ; U10.4 51.96,17.78 ; U8.4 30.48,19.16 ; U8.4 31.86,17.78 ; U8.4 29.1,17.78 ; U8.4 30.48,16.4 ; 8.78,22.86 U2.2 ; U2.2 10.16,24.24 ; U2.2 10.16,21.48 ; U2.2 11.54,22.86 ; U15.4 83.82,44.56 ; U15.4 83.82,41.8 ; U15.4 85.2,43.18 ; U15.4 82.44,43.18 ; U16.5 85.2,17.78 ; U16.5 83.82,19.16 ; U16.5 82.44,17.78 ; U16.5 83.82,16.4 ; U1.2 10.16,44.56 ; U1.2 11.54,43.18 ; U1.2 10.16,41.8 ; U1.2 8.78,43.18 ; 5.08,97.68 U4.3 ; U4.3 5.08,100.44 ; U4.3 6.46,99.06 ; U4.3 3.7,99.06 ; U7.5 30.48,44.56 ; U7.5 31.86,43.18 ; U7.5 30.48,41.8 ; U7.5 29.1,43.18 ; 29.1,73.66 U6.3 ; U6.3 30.48,72.28 ; U6.3 30.48,75.04 ; U6.3 31.86,73.66 ; 57.04,48.26 U9.5 ; U9.5 58.42,46.88 ; U9.5 58.42,49.64 ; U9.5 59.8,48.26 ; 34.18,43.18 U7.2 ; U7.2 36.94,43.18 ; U7.2 35.56,44.56 ; U7.2 35.56,41.8 ; U14.5 83.82,69.96 ; U14.5 85.2,68.58 ; U14.5 82.44,68.58 ; U14.5 83.82,67.2 ; 3.7,93.98 U4.4 ; U4.4 5.08,95.36 ; U4.4 5.08,92.6 ; U4.4 6.46,93.98 ; 59.69,5.93 J2.3 ; J2.3 59.69,7.94 ; J2.3 60.7,6.93 ; J2.3 58.68,6.93 ; J1.3 37.84,6.93 ; J1.3 36.83,7.94 ; J1.3 35.82,6.93 ; J1.3 36.83,5.93 ; R13.1 49.09,11.34 ; R13.1 48.26,12.1 ; R13.1 47.43,11.34 ; U14.2 83.82,75.04 ; U14.2 82.44,73.66 ; U14.2 83.82,72.28 ; U14.2 85.2,73.66 ; 34.18,99.06 U5.3 ; U5.3 36.94,99.06 ; U5.3 35.56,97.68 ; U5.3 35.56,100.44 ; J2.4 60.7,4.39 ; J2.4 59.69,5.4 ; J2.4 59.69,3.39 ; J2.4 58.68,4.39 ; 5.08,72.28 U3.4 ; U3.4 5.08,75.04 ; U3.4 6.46,73.66 ; U3.4 3.7,73.66 ; U13.3 78.74,95.36 ; U13.3 78.74,92.6 ; U13.3 77.36,93.98 ; U13.3 80.12,93.98 ; 35.47,11.34 R1.1 v1(34.29,12.7) ; U5.5 30.48,95.36 ; U5.5 31.86,93.98 ; U5.5 29.1,93.98 ; U5.5 30.48,92.6 ; 3.7,22.86 U2.3 ; U2.3 5.08,24.24 ; U2.3 5.08,21.48 ; U2.3 6.46,22.86 ; U10.2 58.42,24.24 ; U10.2 58.42,21.48 ; U10.2 57.04,22.86 ; U10.2 59.8,22.86 ; U9.4 58.42,44.56 ; U9.4 57.04,43.18 ; U9.4 58.42,41.8 ; U9.4 59.8,43.18 ; 3.7,43.18 U1.5 ; U1.5 6.46,43.18 ; U1.5 5.08,41.8 ; U1.5 5.08,44.56 ; 53.34,92.6 U12.4 ; U12.4 51.96,93.98 ; U12.4 54.72,93.98 ; U12.4 53.34,95.36 ; 35.56,16.4 U8.5 ; U8.5 36.94,17.78 ; U8.5 35.56,19.16 ; U8.5 34.18,17.78 ; U1.3 11.54,48.26 ; U1.3 10.16,49.64 ; U1.3 10.16,46.88 ; U1.3 8.78,48.26 ; 34.18,73.66 U6.2 ; U6.2 35.56,72.28 ; U6.2 35.56,75.04 ; U6.2 36.94,73.66 ; 35.56,92.6 U5.2 ; U5.2 35.56,95.36 ; U5.2 36.94,93.98 ; U5.2 34.18,93.98 ; 82.44,48.26 U15.5 ; U15.5 85.2,48.26 ; U15.5 83.82,46.88 ; U15.5 83.82,49.64 ; 24.77,6.14 R5.1 ; R5.1 24.77,7.66 ; R5.1 23.93,6.9 ; 10.16,92.6 U4.5 ; U4.5 11.54,93.98 ; U4.5 10.16,95.36 ; U4.5 8.78,93.98 ; U16.4 80.12,17.78 ; U16.4 77.36,17.78 ; U16.4 78.74,16.4 ; U16.4 78.74,19.16 ; 10.16,67.2 U3.2 ; U3.2 10.16,69.96 ; U3.2 8.78,68.58 ; U3.2 11.54,68.58 ; 35.82,4.39 J1.4 ; J1.4 37.84,4.39 ; J1.4 36.83,3.39 ; J1.4 36.83,5.4 ; 3.7,17.78 U2.4 ; U2.4 5.08,16.4 ; U2.4 6.46,17.78 ; U2.4 5.08,19.16 ; U14.4 78.74,69.96 ; U14.4 80.12,68.58 ; U14.4 77.36,68.58 ; U14.4 78.74,67.2 ; 30.48,46.88 U7.4 ; U7.4 31.86,48.26 ; U7.4 30.48,49.64 ; U7.4 29.1,48.26 ; U12.5 59.8,93.98 ; U12.5 58.42,95.36 ; U12.5 57.04,93.98 ; U12.5 58.42,92.6 ; 3.7,68.58 U3.5 ; U3.5 5.08,69.96 ; U3.5 5.08,67.2 ; U3.5 6.46,68.58 ; 77.36,48.26 U15.2 ; U15.2 80.12,48.26 ; U15.2 78.74,46.88 ; U15.2 78.74,49.64 ; 51.96,73.66 U11.2 ; U11.2 53.34,72.28 ; U11.2 54.72,73.66 ; U11.2 53.34,75.04 ; 51.96,43.18 U9.3 ; U9.3 54.72,43.18 ; U9.3 53.34,41.8 ; U9.3 53.34,44.56 ; U13.5 85.2,99.06 ; U13.5 82.44,99.06 ; U13.5 83.82,97.68 ; U13.5 83.82,100.44 ; 51.96,22.86 U10.3 ; U10.3 54.72,22.86 ; U10.3 53.34,21.48 ; U10.3 53.34,24.24 ; U11.5 58.42,75.04 ; U11.5 59.8,73.66 ; U11.5 58.42,72.28 ; U11.5 57.04,73.66 ; R10.1 54.61,12.1 ; 35.56,46.88 U7.3 ; U7.3 34.18,48.26 ; U7.3 35.56,49.64 ; U7.3 36.94,48.26 ; R3.1 29.21,12.06 ; R3.1 28.38,11.34 ; R3.1 29.21,10.58 ; 10.16,72.28 U3.3 ; U3.3 11.54,73.66 ; U3.3 10.16,75.04 ; U3.3 8.78,73.66 ; U15.3 80.12,43.18 ; U15.3 78.74,44.56 ; U15.3 78.74,41.8 ; U15.3 77.36,43.18 ; U2.5 10.16,19.16 ; U2.5 8.78,17.78 ; U2.5 11.54,17.78 ; U2.5 10.16,16.4 ; 77.36,22.86 U16.3 ; U16.3 80.12,22.86 ; U16.3 78.74,21.48 ; U16.3 78.74,24.24 ; 77.36,73.66 U14.3 ; U14.3 78.74,72.28 ; U14.3 80.12,73.66 ; U14.3 78.74,75.04 ; 31.75,12.1 R2.1 ; U11.4 58.42,69.96 ; U11.4 59.8,68.58 ; U11.4 58.42,67.2
  vias: v1(3.82,35.72) v1(3.82,32.87) v1(3.82,25.55) v1(4.08,38.25) v1(4.06,30.35) v1(4.07,28.08) v1(5.71,71.75) v1(5.71,70.48) v1(5.71,46.35) v1(5.71,45.09) v1(5.71,20.95) v1(5.71,19.68) v1(5.84,97.03) v1(5.84,96.01) v1(5.92,34.3) v1(6.36,81.28) v1(6.36,78.74) v1(6.36,76.2) v1(6.36,62.81) v1(6.36,60.27) v1(6.36,57.73) v1(6.36,55.19) v1(6.36,52.65) v1(6.36,50.11) v1(6.36,39.37) v1(6.35,36.83) v1(6.35,31.75) v1(6.34,29.22) v1(6.35,26.67) v1(6.46,83.82) v1(6.41,65.35) v1(6.99,69.22) v1(6.99,43.81) v1(6.99,18.41) v1(7.11,98.3) v1(7.11,94.74) v1(7.87,15.49) v1(8,37.33) v1(8.04,41.27) v1(8.13,98.3) v1(8.13,94.74) v1(8.26,85.61) v1(8.26,69.22) v1(8.26,43.81) v1(8.24,32.49) v1(8.26,31.11) v1(8.26,18.41) v1(8.37,27.54) v1(8.59,66.67) v1(8.88,81.28) v1(8.88,78.74) v1(8.88,76.2) v1(8.88,62.26) v1(8.88,59.72) v1(8.88,57.18) v1(8.88,54.64) v1(8.88,52.1) v1(8.88,49.56) v1(8.88,34.95) v1(8.89,29.21) v1(8.88,25.05) v1(9.53,71.75) v1(9.53,70.48) v1(9.53,46.35) v1(9.53,45.09) v1(9.53,36.32) v1(9.53,30.86) v1(9.53,20.95) v1(9.53,19.68) v1(9.85,83.12) v1(10.11,38.74) v1(10.48,33.22) v1(10.59,64.14) v1(10.58,41.27) v1(10.69,85.84) v1(10.82,28.67) v1(11.13,66.67) v1(12.06,80.64) v1(12.06,77.47) v1(12.07,71.56) v1(12.07,69.02) v1(12.38,83.32) v1(12.7,97.78) v1(12.7,95.26) v1(12.65,38.73) v1(12.71,36.19) v1(12.7,33.78) v1(12.71,26.97) v1(12.71,24.43) v1(12.71,21.89) v1(12.71,19.35) v1(12.71,16.81) v1(12.71,14.27) v1(12.71,11.86) v1(12.71,9.32) v1(12.71,6.78) v1(12.71,4.24) v1(12.71,74.02) v1(13.13,64.14) v1(13.12,41.27) v1(13.13,31.11) v1(13.23,85.84) v1(13.62,1.74) v1(14.6,68.76) v1(14.6,66.22) v1(14.92,83.32) v1(14.99,61.21) v1(14.99,53.59) v1(14.99,30.73) v1(14.99,23.11) v1(15.05,94.29) v1(15.09,74.92) v1(15.24,97.67) v1(15.24,80.64) v1(15.24,77.47) v1(15.25,71.21) v1(15.25,63.59) v1(15.25,58.51) v1(15.25,55.97) v1(15.25,50.89) v1(15.25,48.35) v1(15.25,45.81) v1(15.25,43.27) v1(15.25,40.73) v1(15.25,38.19) v1(15.25,35.65) v1(15.25,28.03) v1(15.25,25.49) v1(15.25,20.41) v1(15.25,17.87) v1(15.23,14.44) v1(15.23,11.9) v1(15.49,114.55) v1(15.49,106.93) v1(15.49,99.31) v1(15.49,91.69) v1(15.62,9.4) v1(15.62,6.86) v1(15.62,4.32) v1(15.77,85.84) v1(16.11,1.28) v1(16.71,15.8) v1(16.85,92.49) v1(17.03,95.88) v1(17.35,82.59) v1(17.36,73.79) v1(17.79,80.59) v1(17.79,78.05) v1(17.79,75.51) v1(17.77,71.29) v1(17.77,68.75) v1(17.77,66.21) v1(17.77,63.67) v1(17.77,61.13) v1(17.77,58.59) v1(17.77,56.05) v1(17.77,53.51) v1(17.77,50.97) v1(17.77,48.43) v1(17.77,45.89) v1(17.77,43.35) v1(17.77,40.81) v1(17.77,38.27) v1(17.77,35.73) v1(17.77,33.19) v1(17.77,30.65) v1(17.77,28.11) v1(17.77,25.57) v1(17.77,23.03) v1(17.77,20.49) v1(17.71,11.24) v1(18.11,17.97) v1(18.24,85.78) v1(18.31,2.56) v1(18.41,7.63) v1(18.41,5.09) v1(18.51,14) v1(18.64,90.7) v1(18.83,94.08) v1(20.04,83.98) v1(20.07,15.88) v1(20.33,94.41) v1(20.33,88.8) v1(20.33,86.26) v1(20.31,81.45) v1(20.31,78.91) v1(20.31,76.37) v1(20.31,73.83) v1(20.31,71.29) v1(20.31,68.75) v1(20.31,66.21) v1(20.31,63.67) v1(20.31,61.13) v1(20.31,58.59) v1(20.31,56.05) v1(20.31,53.51) v1(20.31,50.97) v1(20.31,48.43) v1(20.31,45.89) v1(20.31,43.35) v1(20.31,40.81) v1(20.31,38.27) v1(20.31,35.73) v1(20.31,33.19) v1(20.31,30.65) v1(20.31,28.11) v1(20.31,25.57) v1(20.31,23.03) v1(20.31,20.49) v1(20.62,92.28) v1(20.75,11.42) v1(20.77,8.56) v1(20.82,96.9) v1(20.9,18.1) v1(20.96,6.02) v1(21.97,13.97) v1(22.29,3.86) v1(22.42,90.49) v1(22.44,16.3) v1(22.62,98.7) v1(22.85,94.58) v1(22.85,87.99) v1(22.85,85.45) v1(22.85,82.91) v1(22.85,80.37) v1(22.85,77.83) v1(22.85,75.29) v1(22.85,72.75) v1(22.85,70.21) v1(22.85,67.67) v1(22.85,65.13) v1(22.85,62.59) v1(22.85,60.05) v1(22.85,57.51) v1(22.85,54.97) v1(22.85,52.43) v1(22.85,49.89) v1(22.85,47.35) v1(22.85,44.81) v1(22.85,42.27) v1(22.85,39.73) v1(22.85,37.19) v1(22.85,34.65) v1(22.85,32.11) v1(22.85,29.57) v1(22.85,27.03) v1(22.85,24.49) v1(22.85,21.95) v1(22.85,19.41) v1(23.11,114.55) v1(23.11,106.93) v1(23.11,9.53) v1(23.5,6.99) v1(23.88,12.06) v1(23.99,17.47) v1(24.25,92.47) v1(24.24,14.51) v1(24.49,96.53) v1(24.65,8.9) v1(24.64,8.26) v1(24.77,3.27) v1(25.13,99.05) v1(25.39,90.19) v1(25.39,87.65) v1(25.39,85.11) v1(25.39,82.57) v1(25.39,80.03) v1(25.39,77.49) v1(25.39,74.95) v1(25.39,72.41) v1(25.39,69.87) v1(25.39,67.33) v1(25.39,64.79) v1(25.39,62.25) v1(25.39,59.71) v1(25.39,57.17) v1(25.39,54.63) v1(25.39,52.09) v1(25.39,49.55) v1(25.39,47.01) v1(25.39,44.47) v1(25.39,41.93) v1(25.39,39.39) v1(25.39,36.85) v1(25.39,34.31) v1(25.39,31.77) v1(25.39,29.23) v1(25.39,26.69) v1(25.39,24.15) v1(25.39,21.61) v1(25.78,15.67) v1(25.91,13.21) v1(26.04,2.54) v1(26.91,95.77) v1(26.89,87.62) v1(27.43,11.43) v1(27.57,98.62) v1(27.58,13.87) v1(27.64,98.61) v1(27.93,83.06) v1(27.93,80.52) v1(27.93,77.98) v1(27.93,75.44) v1(27.93,72.9) v1(27.93,70.36) v1(27.93,67.82) v1(27.93,65.28) v1(27.93,62.74) v1(27.93,60.2) v1(27.93,57.66) v1(27.93,55.12) v1(27.93,52.58) v1(27.93,50.04) v1(27.93,47.5) v1(27.93,44.96) v1(27.93,42.42) v1(27.93,39.88) v1(27.93,37.34) v1(27.93,34.8) v1(27.93,32.26) v1(27.93,29.72) v1(27.93,27.18) v1(27.93,24.64) v1(27.93,22.1) v1(27.95,19.56) v1(27.94,2.54) v1(28.99,27.01) v1(29.21,13.34) v1(29.21,12.7) v1(29.43,87.62) v1(29.44,85.1) v1(29.84,2.54) v1(30.07,41.27) v1(30.23,30.73) v1(30.48,34.04) v1(30.48,13.34) v1(30.48,12.7) v1(30.73,114.55) v1(30.73,106.93) v1(30.73,61.21) v1(30.73,53.59) v1(30.73,38.35) v1(30.79,25.21) v1(30.95,37.18) v1(31.11,71.75) v1(31.11,70.48) v1(31.11,46.35) v1(31.11,45.09) v1(31.11,20.95) v1(31.11,19.68) v1(31.24,28.7) v1(31.76,84.05) v1(31.76,81.51) v1(31.76,78.97) v1(31.76,76.43) v1(31.76,50.22) v1(31.75,13.46) v1(31.75,12.83) v1(31.75,2.54) v1(31.97,87.62) v1(32.39,69.22) v1(32.39,43.81) v1(32.38,27.19) v1(32.39,18.41) v1(32.46,52.66) v1(32.51,38.74) v1(32.51,98.55) v1(32.51,94.49) v1(32.61,41.27) v1(32.77,35.56) v1(32.77,33.78) v1(33.1,31.11) v1(33.02,28.7) v1(33.02,13.34) v1(33.02,12.7) v1(33.32,38.09) v1(33.53,98.55) v1(33.53,94.49) v1(33.66,69.22) v1(33.66,43.81) v1(33.66,18.41) v1(33.66,2.54) v1(34.17,86.36) v1(34.17,25.4) v1(34.28,83.82) v1(34.28,81.28) v1(34.28,78.74) v1(34.28,76.2) v1(34.26,54.46) v1(34.29,13.97) v1(34.29,13.34) v1(34.54,35.56) v1(34.54,33.78) v1(34.71,51.35) v1(34.7,51.33) v1(34.92,71.75) v1(34.92,70.48) v1(34.92,46.35) v1(34.92,45.09) v1(34.92,20.95) v1(34.92,19.68) v1(35.05,97.03) v1(35.05,96.01) v1(35.05,38.74) v1(35.15,41.27) v1(35.35,29.93) v1(35.56,13.34) v1(35.56,12.7) v1(35.56,2.54) v1(35.86,38.09) v1(36.05,56.25) v1(36.2,28.57) v1(36.5,53.13) v1(36.58,35.56) v1(36.58,33.78) v1(36.69,13.98) v1(36.82,25.41) v1(36.89,12.64) v1(36.82,9.03) v1(37.47,71.06) v1(37.47,65.98) v1(37.47,63.44) v1(37.47,58.36) v1(37.47,39.5) v1(37.47,2.54) v1(37.85,68.83) v1(37.85,61.21) v1(38.08,73.53) v1(38.1,17.14) v1(38.3,54.93) v1(38.24,37.2) v1(38.35,114.55) v1(38.35,106.93) v1(38.35,99.31) v1(38.35,91.69) v1(38.35,84.07) v1(38.35,76.45) v1(38.35,53.59) v1(38.35,45.97) v1(38.35,38.35) v1(38.69,14.44) v1(38.63,10.81) v1(38.73,34.71) v1(38.73,32.17) v1(38.73,29.63) v1(38.73,27.09) v1(38.74,24.6) v1(38.74,22.06) v1(38.74,19.52) v1(39.37,8.89) v1(39.37,2.54) v1(39.89,42.54) v1(40,74.3) v1(40,69.51) v1(40,66.97) v1(40,64.43) v1(40,61.89) v1(40,59.35) v1(40,56.81) v1(40.43,12.61) v1(40.64,71.75) v1(41.28,69.16) v1(41.28,66.62) v1(41.28,64.08) v1(41.28,61.54) v1(41.28,59) v1(41.28,56.46) v1(41.28,53.92) v1(41.28,51.38) v1(41.28,48.84) v1(41.28,46.3) v1(41.28,43.76) v1(41.28,41.22) v1(41.28,38.68) v1(41.28,36.14) v1(41.28,33.6) v1(41.28,31.06) v1(41.28,28.52) v1(41.28,25.98) v1(41.28,23.44) v1(41.28,20.9) v1(41.27,15.01) v1(41.27,8.26) v1(41.27,6.35) v1(41.27,4.45) v1(41.27,2.54) v1(41.91,17.14) v1(42.61,74.11) v1(43.24,18.6) v1(43.81,71.87) v1(43.81,69.33) v1(43.81,66.79) v1(43.81,64.25) v1(43.81,61.71) v1(43.81,59.17) v1(43.81,56.63) v1(43.81,54.09) v1(43.81,51.55) v1(43.81,49.01) v1(43.81,46.47) v1(43.81,43.93) v1(43.81,41.39) v1(43.81,38.85) v1(43.81,36.31) v1(43.81,33.77) v1(43.81,31.23) v1(43.81,28.69) v1(43.81,26.15) v1(43.81,23.61) v1(43.81,21.07) v1(43.82,15.83) v1(43.82,13.29) v1(45.1,75.12) v1(45.08,11.08) v1(45.97,114.55) v1(45.97,106.93) v1(45.97,99.31) v1(45.97,91.69) v1(45.97,84.07) v1(45.97,7.87) v1(46.39,72.84) v1(46.35,70.3) v1(46.35,67.76) v1(46.35,65.22) v1(46.35,62.68) v1(46.35,60.14) v1(46.35,57.6) v1(46.35,55.06) v1(46.35,52.52) v1(46.35,49.98) v1(46.35,47.44) v1(46.35,44.9) v1(46.35,42.36) v1(46.35,39.82) v1(46.35,37.28) v1(46.35,34.74) v1(46.35,32.2) v1(46.35,29.66) v1(46.35,27.12) v1(46.35,24.58) v1(46.35,22.04) v1(46.35,19.5) v1(46.35,14.24) v1(46.88,9.29) v1(46.99,6.35) v1(47.4,37.76) v1(47.5,16.51) v1(47.6,75.56) v1(47.62,4.45) v1(48.26,13.34) v1(48.26,12.7) v1(48.9,72.48) v1(48.9,69.94) v1(48.9,67.4) v1(48.9,64.86) v1(48.9,62.32) v1(48.9,33.88) v1(48.89,31.34) v1(48.9,31.34) v1(48.9,28.8) v1(48.9,26.26) v1(48.89,23.72) v1(48.89,21.18) v1(48.89,18.64) v1(48.89,2.54) v1(49.33,15.14) v1(49.49,59.85) v1(49.53,54.86) v1(49.53,13.34) v1(49.53,12.7) v1(49.65,47.19) v1(49.88,38.33) v1(50.11,75.16) v1(50.6,14.92) v1(50.8,2.54) v1(50.97,24.77) v1(51.43,72.99) v1(51.43,70.45) v1(51.43,67.91) v1(51.43,65.37) v1(51.43,62.83) v1(51.43,32.83) v1(51.43,30.29) v1(51.6,58.43) v1(51.67,40.12) v1(52.07,36.83) v1(52.08,27.83) v1(52.07,13.34) v1(52.07,12.7) v1(52.7,2.54) v1(53.34,35.56) v1(53.34,13.34) v1(53.34,12.7) v1(53.49,25.04) v1(53.59,114.55) v1(53.59,106.93) v1(53.59,61.21) v1(53.59,38.35) v1(53.63,29.84) v1(53.85,97.03) v1(53.85,96.01) v1(53.98,81.92) v1(53.98,79.38) v1(53.98,76.83) v1(53.97,71.75) v1(53.97,70.48) v1(53.97,46.35) v1(53.97,45.09) v1(53.94,41.27) v1(53.97,33.02) v1(53.97,20.95) v1(53.97,19.68) v1(54.14,58.37) v1(54.61,91.44) v1(54.62,55.88) v1(54.62,53.34) v1(54.62,50.8) v1(54.61,35.56) v1(54.62,27.31) v1(54.61,13.34) v1(54.61,12.7) v1(54.61,2.54) v1(54.74,83.95) v1(55.25,88.9) v1(55.25,69.22) v1(55.25,43.81) v1(55.25,38.73) v1(55.25,18.41) v1(55.37,98.55) v1(55.63,60.46) v1(55.74,25.14) v1(55.88,13.34) v1(55.88,12.7) v1(56.17,29.84) v1(56.39,98.55) v1(56.51,81.92) v1(56.51,79.38) v1(56.51,76.83) v1(56.48,41.27) v1(56.51,31.66) v1(56.52,69.22) v1(56.52,43.81) v1(56.52,36.2) v1(56.52,33.66) v1(56.52,18.41) v1(56.52,2.54) v1(57.07,87.19) v1(57.14,91.44) v1(57.15,84.45) v1(57.14,58.42) v1(57.14,55.88) v1(57.14,53.34) v1(57.14,50.8) v1(57.15,38.73) v1(57.16,27.25) v1(57.15,13.34) v1(57.15,12.7) v1(57.31,68.58) v1(57.39,66.05) v1(57.37,2.39) v1(57.78,71.75) v1(57.78,70.48) v1(57.78,46.35) v1(57.78,45.09) v1(57.78,20.95) v1(57.78,19.68) v1(57.91,97.03) v1(57.91,96.01) v1(58.12,59.96) v1(58.41,8.9) v1(58.52,89.31) v1(58.69,29.46) v1(58.88,24.71) v1(59.02,41.27) v1(59.06,38.73) v1(59.06,34.92) v1(59.06,32.38) v1(59.6,81.92) v1(59.69,84.45) v1(59.7,79.49) v1(59.7,76.95) v1(59.68,27.12) v1(59.69,1.37) v1(59.82,16.86) v1(60.32,87.51) v1(60.33,36.83) v1(60.33,34.92) v1(60.33,32.38) v1(60.83,29.85) v1(60.96,75.56) v1(60.95,8.9) v1(61.21,114.55) v1(61.21,106.93) v1(61.21,99.31) v1(61.21,91.69) v1(61.21,68.83) v1(61.21,61.21) v1(61.21,53.59) v1(61.21,45.97) v1(61.21,23.11) v1(61.56,41.19) v1(61.99,18.69) v1(62.12,85.72) v1(62.14,81.92) v1(62.24,79.49) v1(62.23,1.37) v1(62.87,74.41) v1(62.87,71.87) v1(62.87,69.33) v1(62.87,66.79) v1(62.87,64.25) v1(62.87,61.71) v1(62.87,59.17) v1(62.87,56.63) v1(62.87,54.09) v1(62.87,51.55) v1(62.87,49.01) v1(62.87,46.47) v1(62.87,43.93) v1(62.87,41.39) v1(62.87,38.85) v1(62.87,36.31) v1(62.87,33.77) v1(62.87,31.23) v1(62.87,28.69) v1(62.87,26.15) v1(62.87,23.61) v1(62.87,21.07) v1(63.5,78.11) v1(63.49,8.9) v1(64.03,14.76) v1(64.14,83.82) v1(64.14,80.01) v1(64.14,6.99) v1(64.14,5.08) v1(64.8,85.9) v1(64.77,3.89) v1(64.77,1.37) v1(65.17,19.34) v1(65.4,78.31) v1(65.4,75.77) v1(65.4,73.23) v1(65.4,70.69) v1(65.4,68.15) v1(65.4,65.61) v1(65.4,63.07) v1(65.4,60.53) v1(65.4,57.99) v1(65.4,55.45) v1(65.4,52.91) v1(65.4,50.37) v1(65.4,47.83) v1(65.4,45.29) v1(65.4,42.75) v1(65.4,40.21) v1(65.4,37.67) v1(65.4,35.13) v1(65.4,32.59) v1(65.4,30.05) v1(65.4,27.51) v1(65.4,24.97) v1(65.4,22.43) v1(65.71,82.12) v1(65.79,13.34) v1(65.82,16.56) v1(66.03,8.9) v1(67.26,11.5) v1(67.31,6.99) v1(67.31,6.35) v1(67.69,15.24) v1(67.95,81.78) v1(67.95,79.24) v1(67.94,75.29) v1(67.94,72.75) v1(67.94,70.21) v1(67.94,67.67) v1(67.94,65.13) v1(67.94,62.59) v1(67.94,60.05) v1(67.94,57.51) v1(67.94,54.97) v1(67.94,52.43) v1(67.94,49.89) v1(67.94,47.35) v1(67.94,44.81) v1(67.94,42.27) v1(67.94,39.73) v1(67.94,37.19) v1(67.94,34.65) v1(67.94,32.11) v1(67.94,29.57) v1(67.94,27.03) v1(67.94,24.49) v1(67.94,21.95) v1(67.94,19.41) v1(68.13,1.37) v1(68.57,9) v1(68.83,114.55) v1(68.83,106.93) v1(68.83,99.31) v1(68.83,91.69) v1(68.83,7.87) v1(69.05,13.3) v1(69.6,17.14) v1(69.77,83.24) v1(70.28,3.89) v1(70.36,10.79) v1(70.49,79.71) v1(70.49,77.17) v1(70.49,74.63) v1(70.49,72.09) v1(70.49,69.55) v1(70.49,67.01) v1(70.49,64.47) v1(70.49,61.93) v1(70.49,59.39) v1(70.49,56.85) v1(70.49,54.31) v1(70.49,51.77) v1(70.49,49.23) v1(70.49,46.69) v1(70.49,44.15) v1(70.49,41.61) v1(70.49,39.07) v1(70.49,36.53) v1(70.49,33.99) v1(70.49,31.45) v1(70.49,28.91) v1(70.49,26.37) v1(70.49,23.83) v1(70.49,21.29) v1(70.49,18.75) v1(70.67,1.37) v1(70.85,15.09) v1(71.37,81.27) v1(71.57,85.04) v1(72.16,12.59) v1(72.4,10.38) v1(72.4,7.84) v1(72.4,5.3) v1(72.65,16.89) v1(73.02,77.82) v1(73.02,75.28) v1(73.02,72.74) v1(73.02,70.2) v1(73.02,67.66) v1(73.02,65.12) v1(73.02,62.58) v1(73.02,60.04) v1(73.02,57.5) v1(73.02,54.96) v1(73.02,52.42) v1(73.02,49.88) v1(73.02,47.34) v1(73.02,44.8) v1(73.02,42.26) v1(73.02,39.72) v1(73.02,37.18) v1(73.02,34.64) v1(73.02,32.1) v1(73.02,29.56) v1(73.02,27.02) v1(73.02,24.48) v1(73.02,21.94) v1(73.02,19.4) v1(73.17,83.07) v1(73.21,1.37) v1(73.37,86.83) v1(73.96,14.39) v1(74.3,64.77) v1(74.37,81.91) v1(74.95,88.04) v1(74.92,10.86) v1(74.92,8.32) v1(74.92,5.78) v1(74.92,3.24) v1(75.02,79.38) v1(75.2,84.59) v1(75.56,62.08) v1(75.56,59.54) v1(75.56,57) v1(75.56,54.46) v1(75.56,51.92) v1(75.56,49.38) v1(75.56,46.84) v1(75.56,44.3) v1(75.56,41.76) v1(75.56,39.22) v1(75.56,36.68) v1(75.56,34.14) v1(75.56,31.6) v1(75.56,29.06) v1(75.56,26.52) v1(75.56,23.98) v1(75.56,21.44) v1(75.56,18.9) v1(75.56,16.36) v1(75.95,106.93) v1(76.17,65.91) v1(76.34,12.96) v1(76.45,114.55) v1(76.45,99.31) v1(76.45,91.69) v1(76.45,76.45) v1(76.45,68.83) v1(76.45,61.21) v1(76.54,86.06) v1(76.75,89.83) v1(76.91,81.91) v1(77.56,79.38) v1(77.97,63.38) v1(78.1,32.58) v1(78.1,30.04) v1(78.1,19.88) v1(78.1,14.8) v1(78.11,58.77) v1(78.11,37.63) v1(78.11,27.48) v1(78.33,87.85) v1(78.54,91.63) v1(78.54,61.27) v1(78.71,65.91) v1(78.64,35.15) v1(78.63,24.99) v1(79.25,97.03) v1(79.25,96.01) v1(79.38,71.75) v1(79.38,70.48) v1(79.38,46.35) v1(79.38,45.09) v1(79.38,20.95) v1(79.38,19.68) v1(79.45,81.91) v1(79.79,56.86) v1(79.97,39.36) v1(79.98,29.2) v1(80.02,78.74) v1(80.02,76.2) v1(80.02,52.35) v1(80.02,49.81) v1(80.13,89.65) v1(80.38,54.86) v1(80.51,63.38) v1(80.64,69.22) v1(80.64,43.81) v1(80.64,18.41) v1(80.77,98.55) v1(81.03,34.28) v1(81.25,65.91) v1(81.28,26.67) v1(81.79,98.55) v1(81.88,81.19) v1(81.93,91.44) v1(81.91,69.22) v1(81.91,43.81) v1(81.98,36.82) v1(81.91,18.41) v1(82.16,31.74) v1(82.28,59.7) v1(82.31,56.52) v1(82.54,78.74) v1(82.54,76.2) v1(82.54,51.5) v1(82.51,39.36) v1(82.52,29.2) v1(83.19,71.75) v1(83.19,70.48) v1(83.19,46.35) v1(83.19,45.09) v1(83.19,20.95) v1(83.19,19.68) v1(83.31,97.03) v1(83.31,96.01) v1(83.31,26.67) v1(83.31,24.61) v1(83.79,65.32) v1(84.07,114.55) v1(84.07,91.69) v1(84.07,84.07) v1(84.07,76.45) v1(84.07,53.59) v1(84.07,15.49) v1(84.42,58.33) v1(84.52,36.65) v1(84.58,31.75) v1(84.64,60.63) v1(85.08,63.13) v1(85.08,55.88)
N17882: length 106.6
  TOP w0.34: J1.11 25.91,7.7 R4.2 25.91,9.35 25.1,10.16 24.13,10.16 16.51,17.78 16.51,72.86 15.71,73.66 14.14,73.66 13.34,72.86 13.34,66.04 12.7,65.41 8.26,65.41 7.62,64.77 U1.1
N17894: length 106.3
  BOTTOM w0.34: J1.9 R3.2 29.21,9.86 28.91,10.16 26.67,10.16 24.77,12.06 24.77,12.7 19.05,18.41 19.05,83.19 17.78,84.45 8.89,84.45 7.62,83.19 U3.1
N17906: length 106.2
  BOTTOM w0.34: J1.7 R2.2 31.75,10.16 31.44,10.47 30.98,10.47 30.48,10.96 30.48,11.72 29.84,12.35 29.84,13.63 24.13,19.34 24.13,90.81 21.59,93.34 21.59,95.89 23.5,97.79 26.67,97.79 27.94,96.52 U5.1
N17918: length 106.5
  BOTTOM w0.34: J1.5 R1.2 34.29,10.16 33.98,10.47 33.52,10.47 33.02,10.96 33.02,11.72 32.39,12.35 32.39,13.97 33.66,15.24 38.1,15.24 42.55,19.68 42.55,72.68 42.2,73.03 40,73.03 38.73,71.75 38.73,57.15 33.02,51.44 U7.1
N17930: length 106.3
  BOTTOM w0.34: J1.12 26.53,4.53 R5.2 23.41,4.53 22.23,5.71 22.23,8.89 20.95,10.16 18.41,10.16 17.14,8.89 17.14,3.17 16.51,2.54 14.61,2.54 13.97,3.17 13.97,29.21 13.34,29.84 11.43,29.84 10.79,30.48 10.79,31.75 11.43,32.38 13.34,32.38 13.97,33.02 13.97,34.29 13.34,34.92 11.43,34.92 10.79,35.56 10.79,36.83 11.43,37.47 13.34,37.47 13.97,38.1 13.97,39.37 13.34,40.01 8.26,40.01 7.62,39.37 7.62,38.73 6.99,38.1 5.71,38.1 5.08,37.47 5.08,36.2 5.71,35.56 6.99,35.56 7.62,34.92 7.62,33.66 6.99,33.02 5.71,33.02 5.08,32.38 5.08,31.11 5.71,30.48 6.99,30.48 7.62,29.84 7.62,28.57 6.99,27.94 5.71,27.94 5.08,27.3 5.08,26.04 5.71,25.4 6.99,25.4 7.62,24.77 U2.1
N17948: length 106.5
  TOP w0.34: U4.1 14.61,96.52 21.59,89.53 21.59,18.58 29.71,10.47 30.17,10.47 30.48,10.16 R6.2 30.48,5.66 J1.10
N17973: length 106.2
  TOP w0.34: U6.1 33.02,85.72 32.39,86.36 27.3,86.36 26.67,85.72 26.67,19.05 31.11,14.61 31.11,12.56 31.75,11.92 31.75,10.96 32.25,10.47 32.71,10.47 33.02,10.16 R7.2 33.02,5.66 J1.8
N17998: length 106.2
  TOP w0.34: J1.6 35.55,5.65 35.55,7.05 35.56,7.06 R8.2 35.56,9.86 36.06,10.35 36.38,10.35 40,13.97 40,40.64 39.37,41.27 37.47,41.27 36.2,40.01 30.48,40.01 29.21,38.73 29.21,33.02 29.84,32.38 31.11,32.38 31.75,33.02 31.75,36.2 32.39,36.83 33.02,36.83 33.66,36.2 33.66,33.02 34.29,32.38 34.92,32.38 35.56,33.02 35.56,36.2 36.2,36.83 36.83,36.83 37.47,36.2 37.47,27.3 36.83,26.67 34.92,26.67 34.29,27.3 34.29,29.21 33.66,29.84 30.48,29.84 29.84,29.21 29.84,27.94 33.02,24.77 U8.1
N19655: length 106.3
  TOP w0.34: U9.1 55.88,58.42 54.61,59.69 51.44,59.69 50.17,60.96 50.17,73.32 49.19,74.3 46.06,74.3 45.08,73.32 45.08,13.97 48.59,10.47 49.22,10.47 49.53,10.16 R12.2 J2.11
N19661: length 106.7
  BOTTOM w0.34: J2.9 R11.2 52.07,9.86 51.46,10.47 51.14,10.47 50.8,10.81 50.8,13.34 53.34,15.88 60.96,15.88 64.14,19.05 64.14,76.2 63.5,76.83 61.62,76.83 60.96,77.49 60.96,82.55 60.33,83.19 55.88,83.19 55.25,82.55 55.25,75.56 55.88,74.93 U11.1
N19667: length 106.4
  BOTTOM w0.34: J2.7 R10.2 54.61,10.16 54.92,10.47 55.38,10.47 55.88,10.96 55.88,11.72 56.52,12.35 56.52,13.48 57.01,13.97 58.42,13.97 59.65,12.74 63.47,12.74 69.22,18.48 69.22,80.64 81.28,92.71 U13.1
N19673: length 106.7
  BOTTOM w0.34: J2.5 R9.2 57.15,9.92 57.7,10.47 68.25,10.47 74.3,16.51 74.3,62.87 76.2,64.77 82.55,64.77 83.82,63.5 83.82,61.59 83.19,60.96 80.01,60.96 79.38,60.33 79.38,59.06 80.65,57.78 83.19,57.78 83.82,57.15 83.82,55.24 83.19,54.61 81.91,54.61 81.28,53.98 U15.1
N19679: length 106.4
  BOTTOM w0.34: J2.12 48.26,5.66 R13.2 48.26,10.16 47.95,10.47 47.49,10.47 45.08,12.87 45.08,15.88 47.62,18.41 47.62,36.2 48.26,36.83 50.17,36.83 53.34,40.01 60.96,40.01 61.59,39.37 61.59,31.75 60.96,31.11 58.42,31.11 57.78,31.75 57.78,34.29 57.15,34.92 55.88,34.92 55.25,34.29 55.25,31.75 54.61,31.11 53.34,31.11 52.7,31.75 52.7,34.29 52.07,34.92 50.8,34.92 50.17,34.29 50.17,26.67 50.8,26.04 52.7,26.04 53.34,26.67 53.34,27.94 53.97,28.57 57.78,28.57 58.42,27.94 58.42,26.04 55.88,23.5 U10.1
N19687: length 106.6
  TOP w0.34: J2.10 53.34,5.66 R14.2 53.34,10.16 53.65,10.47 54.11,10.47 54.58,10.93 54.58,11.75 55.25,12.42 55.25,13.97 55.88,14.61 62.23,14.61 66.67,19.05 66.67,79.37 55.88,90.17 U12.1
N19697: length 106.5
  TOP w0.34: J2.8 55.88,5.66 R15.2 55.88,10.16 56.19,10.47 56.68,10.47 57.64,11.43 65.4,11.43 71.75,17.78 71.75,80.01 72.39,80.64 80.65,80.64 81.28,80.01 U14.1
N19707: length 106.3
  TOP w0.34: U16.1 81.28,24.77 80.64,25.4 80.01,25.4 79.38,26.04 79.38,27.3 80.01,27.94 83.82,27.94 84.45,28.57 84.45,29.84 83.82,30.48 80.01,30.48 79.38,31.11 79.38,32.38 80.01,33.02 83.82,33.02 84.45,33.66 84.45,34.92 83.82,35.56 80.01,35.56 79.38,36.2 79.38,37.47 80.01,38.1 83.82,38.1 84.45,38.73 84.45,40.01 83.82,40.64 77.47,40.64 76.83,40.01 76.83,15.24 73.66,12.06 73.66,3.17 73.11,2.63 R16.2 58.92,2.63 J2.6

## Copper pours and planes (outline as drawn; the poured copper is in the pictures)
GND on TOP: 2.54,116.33 86.36,116.33 88.39,114.3 88.39,104.14 85.85,101.6 85.85,15.24 88.39,12.7 88.39,2.54 86.36,0.51 2.54,0.51 0.51,2.54 0.51,12.7 3.05,15.24 3.05,101.6 0.51,104.14 0.51,114.3 ; 1 cut-out
GND on BOTTOM, GND1, GND2: 2.54,116.33 86.36,116.33 88.39,114.3 88.39,104.14 85.85,101.6 85.85,15.24 88.39,12.7 88.39,2.54 86.36,0.51 2.54,0.51 0.51,2.54 0.51,12.7 3.05,15.24 3.05,101.6 0.51,104.14 0.51,114.3

## Text on the board
Ref Des/Silkscreen Bottom: 1 | 8 7 6
Ref Des/Silkscreen Top: JA2 | JA6 | JA5 | JA1 | PMOD2SMA | QuIQCL | JA7 | JA3 | JA8 | JA4 | 5  2 3 4 | 5 2 3 4 | JB2 | JB6 | JB5 | JB1 | JB3 | JB7 | JB8 | JB4
NCLEGEND-1-4: FIGURE | FINISHED_SIZE | 0.01 | 0.0433 | 0.0591 | 0.063 | 0.25 | DRILL CHART: TOP to BOTTOM | ALL UNITS ARE IN INCHES | DRILLED_SIZE | - | PLATED | NON-PLATED | QTY | 990 | 22 | 2 | 16 | 64 | 4 | 1098 | TOTAL HOLES:
